# Altium PCB UBSRF315.PcbDoc
Units mm, origin at the board's own origin, x right, y up, seen from the top; angles counter-clockwise.
Board outline 152.4 x 101.6 mm, 2 copper layers (Top Layer, Bottom Layer), stack 0.325 mm thick; 24 components, 26 nets, 86 pads, 22 vias.
Unrouted connection lines stored in the file: 1.
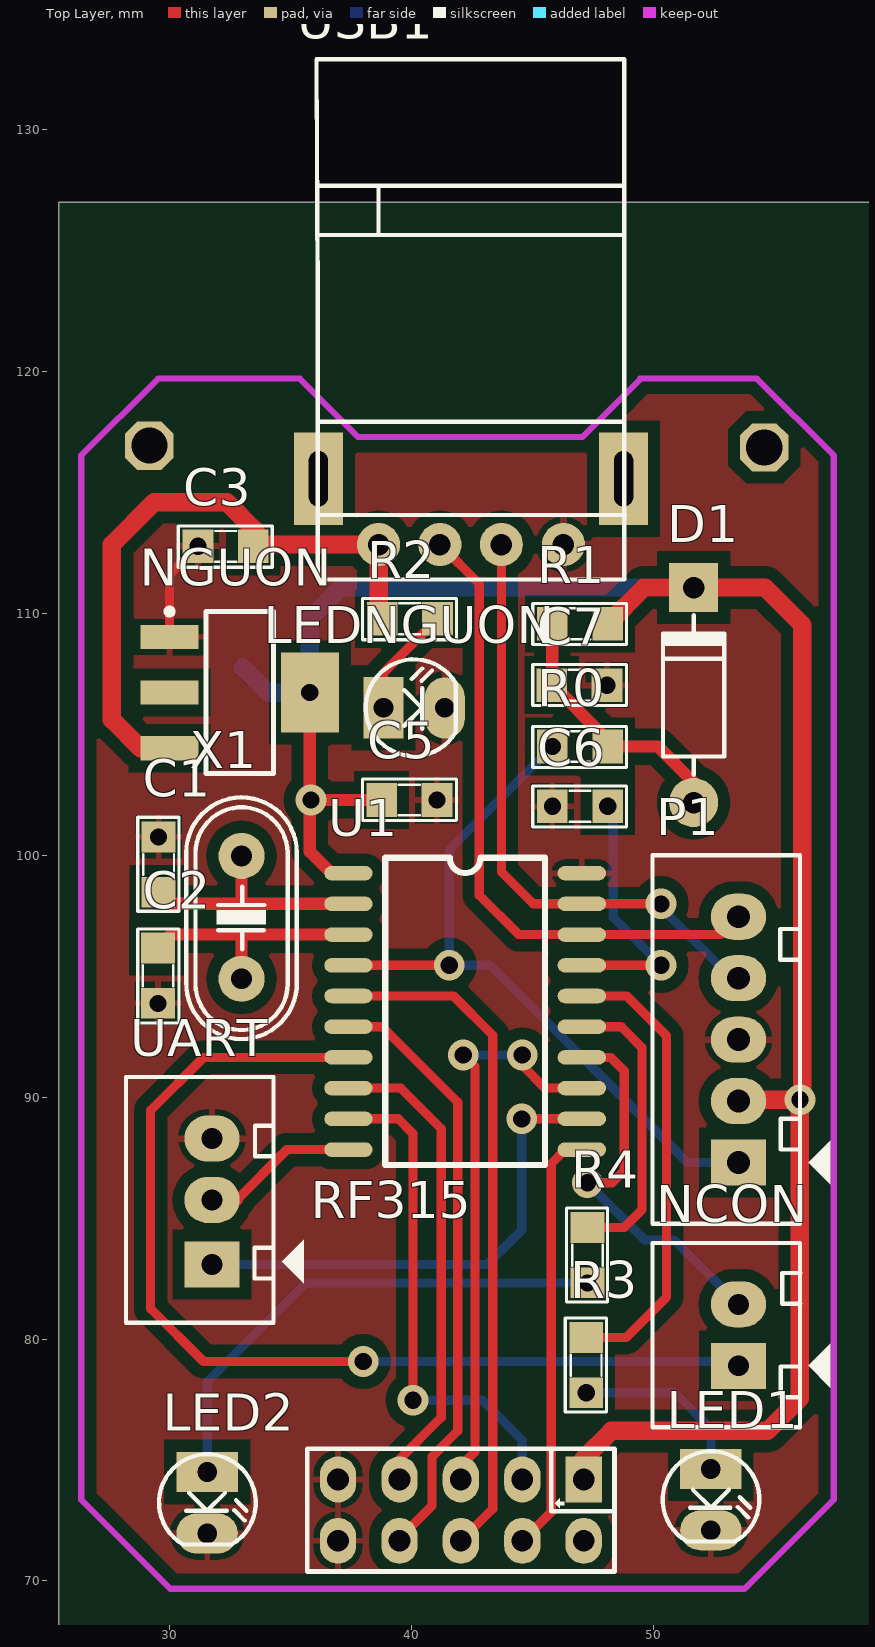
[diagram p0: Top Layer view]
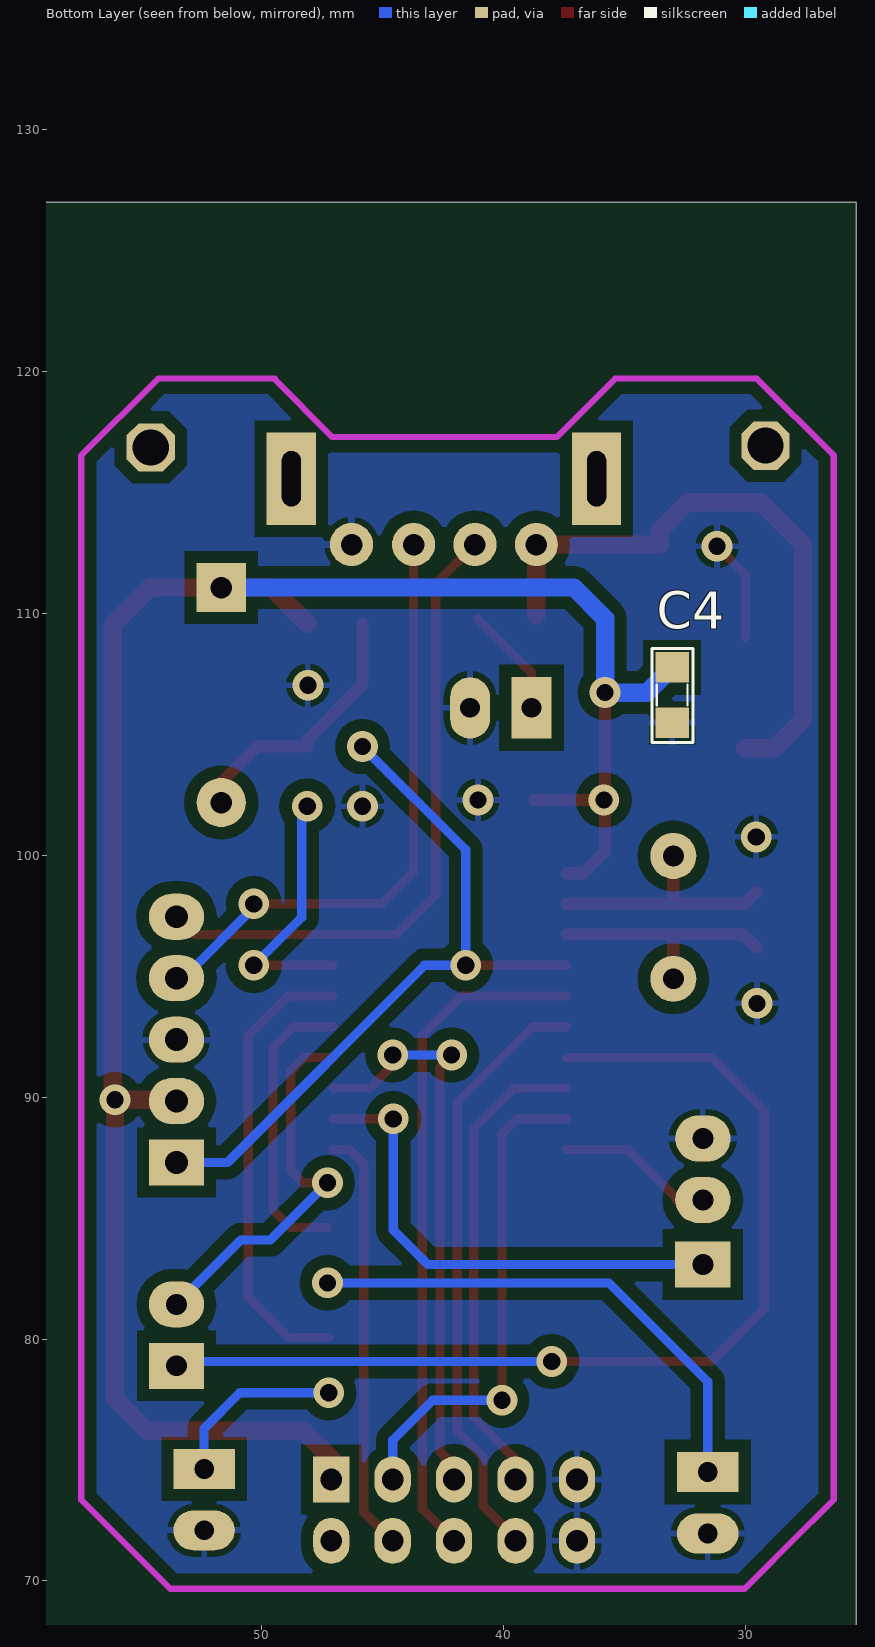
[diagram p1: Bottom Layer view, seen from below]
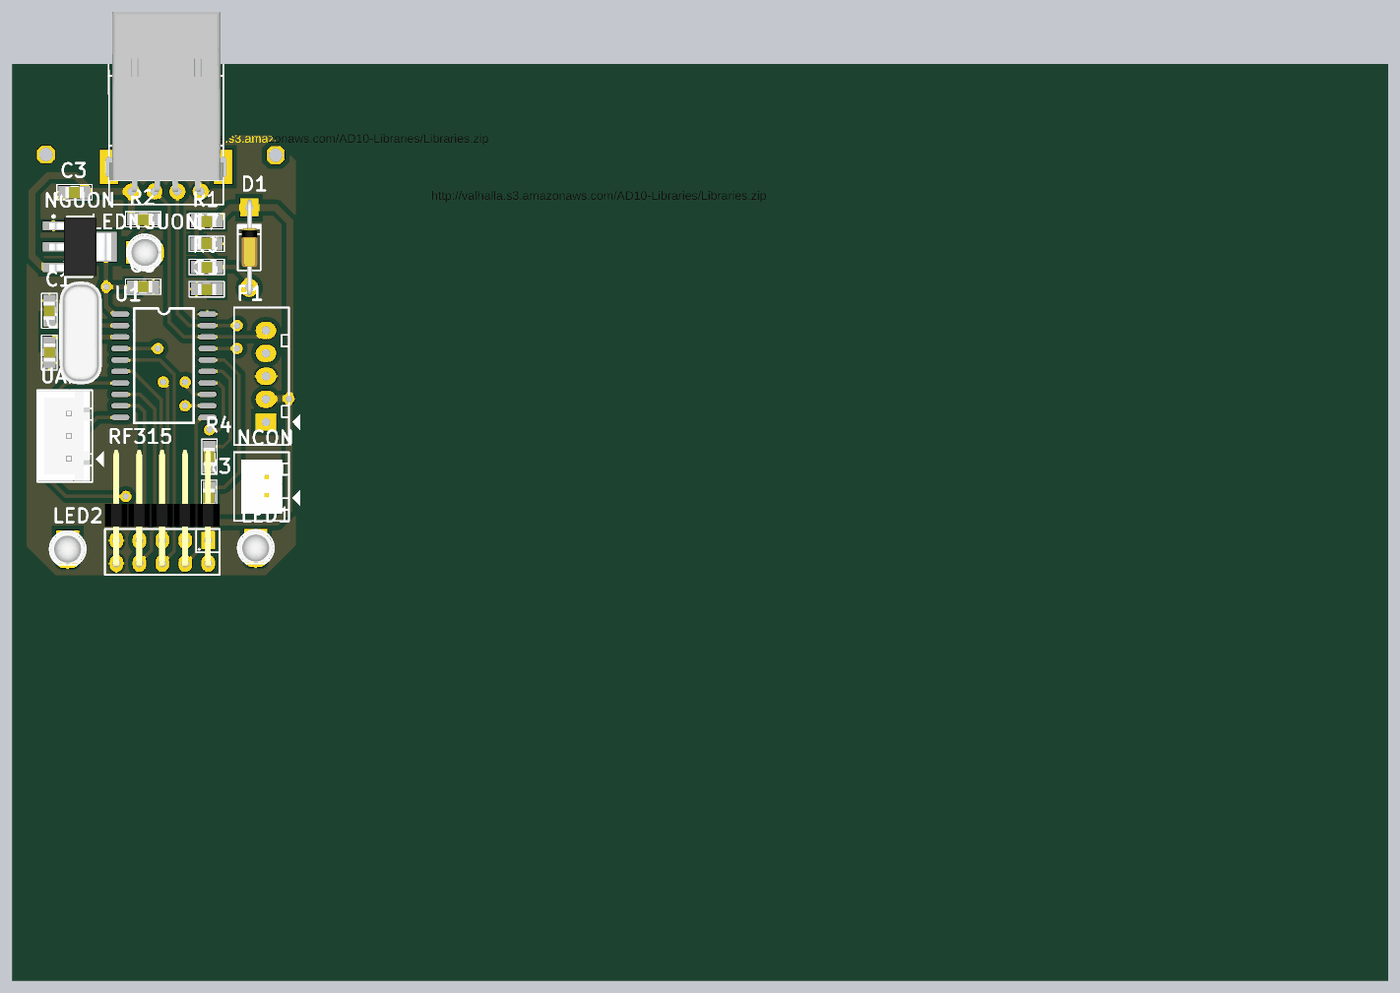
[diagram p2: 3D render of the assembled board from above, using the file's embedded part models]

## Layer stack, top to bottom
Top Layer: signal copper 0.0356
Dielectric 1: core 0.254, FR-4, Dk 4.2
Bottom Layer: signal copper 0.0356

## Board outline
25.4,25.4 177.8,25.4 177.8,127 25.4,127

## Design rules (kind name [scope] priority, off if disabled: settings)
Clearance [All] p1: gap=0.508
PolygonConnect [All] p1: connectstyle=Relief reliefconductorwidth=0.254 reliefentries=4 polygonreliefangle="90 Angle" airgapwidth=0.254
RoomDefinition USB [InComponentClass('USB')] p1: confinementstyle=ConfineIn formatcopy=TRUE lockcomponents=FALSE outline 0,0 50.8,0 50.8,25.4 0,25.4
RoutingVias [All] p1: holewidth=0.711 width=1.27 viastyle="Through Hole" minholewidth=0.711 minwidth=1.27 maxholewidth=0.711 maxwidth=1.27
SolderMaskExpansion [All] p1: expansion=0.102
UnpouredPolygon [All] p1: allowunpoured=FALSE
Width VCC [InNet('VCC')] p1: maxlimit=1.016 minlimit=0.508 preferedwidth=0.762
Width 3.3V [InNet('+3.3V')] p2: maxlimit=1.016 minlimit=0.508 preferedwidth=0.762
Width [All] p3: maxlimit=0.635 minlimit=0.381 preferedwidth=0.508
29 further rules are at their usual default settings.

## Classes and differential pairs
component class USB: USB1

## Components (designator, comment, footprint, x,y, rotation, side; value= is the part's Value field where it differs from the comment)
C1 "33pF" SM-0805 29.54,99.619 r270 top
C2 "33pF" SM-0805 29.515,95.021 r90 top
C3 "103" SM-0805 32.309,112.776 r0 top
C4 "103" SM-0805 33.02,106.629 r90 bottom
C5 "103" SM-0805 39.903,102.286 r180 top
C6 "103" SM-0805 46.965,102.032 r0 top
C7 "103" SM-0805 46.939,107.036 r180 top
D1 "1N4007" D1A 51.664,102.184 r270 top
LED1 "LED" LED-3 52.375,74.625 r270 top
LED2 "LED" LED-3 31.547,74.498 r270 top
LEDNGUON "LED" LED-3 38.837,106.096 r0 top
NCON "JP2" CON2 53.518,78.892 r90 top
NGUON "LM1117" SOT223-4N 32.893,106.731 r0 top
P1 "MACH NAP" CON5 53.518,87.3 r90 top
R0 "330" SM-0805 46.965,104.496 r0 top
R1 "10K" SM-0805 46.965,109.576 r0 top
R2 "220" SM-0805 39.929,109.779 r0 top
R3 "220" SM-0805 47.219,78.918 r270 top
R4 "220" SM-0805 47.269,83.464 r270 top
RF315 "Header 5x2" HED2X5_cen 47.117,74.193 r180 top
U1 "PIC18F14K50-I/P" SOP-20 37.389,99.263 r0 top
UART "JP3" CON3 31.75,83.21 r90 top
USB1 "USB-S" USB-A 38.633,112.852 r0 top
X1 "20MHz" XT2 32.969,97.434 r90 top

## Footprints (in the part's own frame and the unit in brackets; to place one, negate y for a bottom-side part, rotate by r counter-clockwise, add the part's x,y. Pads: shape width x height; smd on the part's side, far side on the other; paste and mask are expansions set on the pad)
CON2 [mil] "CON2"
  rect 75x90 hole 34: 1(0,0)
  oval 75x90 hole 34: 2(100,0)
  silkscreen extent -100,-150 200,140, body extent -68,-70 168,107, height 236
CON3 [mil] "CON 3"
  rect 75x90 hole 34: 1(-5,0)
  oval 75x90 hole 34: 2(100,0) 3(200,0)
  silkscreen extent -100,-150 300,140, body extent -95,-90 295,136, height 276
CON5 [mil] "CON5"
  rect 75x90 hole 37: 1(0,0)
  oval 75x90 hole 37: 2(100,0) 3(200,0) 4(300,0) 5(400,0)
  silkscreen extent -100,-150 500,140
D1A [mil] "Diode 1A, W 100mil, L 350mil"
  round 80 hole 35: 1(0,0)
  rect 80x80 hole 35: 2(-350,0)
  silkscreen extent -305,-50 -45,50, body extent -386,-33 34,36, height 84
HED2X5_cen [mm] "Connector; Header; 5x2 Position"
  rect 1.5x1.9 hole 0.9: 1(0,0)
  oval 1.5x1.9 hole 0.9: 2(2.54,0) 3(5.08,0) 4(7.62,0) 5(10.16,0) 6(0,2.54) 7(2.54,2.54) 8(5.08,2.54) 9(7.62,2.54) 10(10.16,2.54)
  silkscreen extent -1.27,-1.27 11.43,3.81, body extent -1.24,-10.02 11.46,2.86, height 5.02
LED-3 [mil] "LED 2 PIN, 3ly Only colour"
  rect 65x100 hole 32: 1(0,0)
  oval 65x100 hole 32: 2(100,0)
  silkscreen extent -29,-78 118,79, body extent -25,-75 113,75, height 217
SM-0805 [mil] "Compoment SMD 80x50mil"
  rect 50x55 smd: 1(-45,0) 2(45,0)
  silkscreen extent -77,-34 76,33, body extent -40,-27 40,23, height 24
SOP-20 [mm]
  oval 2x0.6 smd: 1(0,0) 2(0,-1.27) 3(0,-2.54) 4(0,-3.81) 5(0,-5.08) 6(0,-6.35) 7(0,-7.62) 8(0,-8.89) 9(0,-10.16) 10(0,-11.43) 11(9.652,-11.43) 12(9.652,-10.16) 13(9.652,-8.89) 14(9.652,-7.62) 15(9.652,-6.35) 16(9.652,-5.08) 17(9.652,-3.81) 18(9.652,-2.54) 19(9.652,-1.27) 20(9.652,0)
  silkscreen extent 1.52,-12.06 8.13,0.64
SOT223-4N [mm] "SOT223, 4-Leads, Body 6.5x3.5mm, Pitch 2.3mm, Lead Span 7mm, IPC Medium Density"
  rect 2.4x1 smd: 1(-2.9,2.3) 2(-2.9,0) 3(-2.9,-2.3)
  rect 2.4x3.3 smd: 4(2.9,0)
  silkscreen extent -3.02,-3.35 1.4,3.47, body extent -3.39,-3.27 3.5,3.23, height 1.72
USB-A [mil]
  round 70 hole 35: 1(0,0) 2(100,0) 3(200,0) 4(301,0)
  rect 80x150 hole 31 slot 90 at 90 deg: 5(-98,107) 6(399,107)
  silkscreen extent -101,-57 401,790, body extent -97,0 399,784, height 177
XT2 [mil] "Footpin for Crystal 2 pin"
  round 75 hole 34: 1(-100,0) 2(100,0)
  silkscreen extent -198,-90 195,90, body extent -233,-93 213,90, height 138

## Part data
C1 C2 C3 C4 C5 C6 C7: library part CM, "Cap SMD"
D1: library part D1A, "Diode 1A"
LED1 LED2 LEDNGUON: "LED Single colour Green and Red"
NCON: library part Con2, "Connector 2"
NGUON: "3v3"
P1: library part "Header 5H", "Header, 5-Pin, Right Angle"
R0 R1 R2 R3 R4: library part R, "Resistor 1/4W"
RF315: library part HED5x2
U1: "USB Flash Microcontroller with nanoWatt XLP Technology, 20-pin PDIP, Industrial Temperature"
UART: library part Con3, "Connector 3"
USB1: library part USB_S, "USB connector"
X1: library part XT2, "Crystal For all Crystal 2pin."

## Free pads (board coordinates)
  oct 2x2 hole 1.5: 0(29.159,116.942) 1(54.585,116.865)

## Via types
v1: diameter 1.27, hole 0.711, Top Layer to Bottom Layer, 22 vias

## Nets (pads, with @x,y where several pads share a name; then routed paths per layer and width w, separated by ;. In a path a pad name is that pad's centre, name@x,y a point inside that pad or via, vN(x,y) a via of type N, cw(c..) or ccw(c..) an arc to the next point about the centre after c; other vN are vias at no path point)
+3.3V: C4.2 C5.2 D1.2 NGUON.2 P1.2 R1.2 RF315.1 U1.1 | length 89.3
  Top Layer w0.508: v1(35.793,106.731) v1@35.793,102.337 ; U1.1 36.678,99.263 35.793,100.148 v1@35.793,102.337 ; C5.2@38.735,102.286 v1(35.844,102.286) v1@35.793,102.337
  Top Layer w0.762: RF315.1 47.117,75.057 48.26,76.2 54.712,76.2 56.058,77.546 v1(56.058,89.891) ; R1.2 49.606,111.074 D1.2 54.61,111.074 56.159,109.525 56.159,89.992 v1(56.058,89.891) ; P1.2@53.873,89.84 P1.2 53.569,89.891 v1(56.058,89.891)
  Bottom Layer w0.762: C4.2 34.061,106.731 v1(35.793,106.731) 35.793,109.783 37.084,111.074 D1.2
D+/PGD: P1.4 U1.19 USB1.3 | length 25.2
  Top Layer w0.381: USB1.3 43.713,99.314 45.034,97.993 U1.19 v1@50.165,97.993
  Bottom Layer w0.381: v1@50.165,97.993 53.238,94.92 P1.4
  other v1: 50.317,97.993
D-/PGC: P1.5 U1.18 USB1.2 | length 26.9
  Top Layer w0.381: USB1.2 42.799,111.227 42.799,98.349 44.425,96.723 U1.18 52.781,96.723 P1.5
GDO0: RF315.9 U1.6 | length 25
  Top Layer w0.381: U1.6 38.786,92.913 41.91,89.789 41.91,76.2 40.843,75.133 40.843,73.101 39.497,71.755 RF315.9
GDO2: RF315.8 U1.5 | length 28.1
  Top Layer w0.381: U1.5 41.732,94.183 43.358,92.558 43.358,72.974 RF315.8
GND: C1.1 C2.1 C3.1 C4.1 C5.1 C6.1 C7.1 LED1.2 LED2.2 LEDNGUON.2 NGUON.1 P1.3 RF315.5 RF315.10 U1.20 UART.3 USB1.4 | length 4.5
  Top Layer w0.381: NGUON.1 29.993,111.603 v1(31.166,112.776) C3.1@31.166,112.471
  other v1: 29.515,93.878 29.54,100.762 45.822,102.032 41.046,102.286 48.082,107.036
LED1: R3.1 U1.16 | length 19
  Top Layer w0.381: U1.16 48.895,94.183 50.546,92.532 50.546,81.737 48.87,80.061 R3.1
LED2: R4.1 U1.15 | length 12.1
  Top Layer w0.381: U1.15 48.666,92.913 49.53,92.05 49.53,85.344 48.793,84.607 R4.1
MCLR: P1.1 R0.1 U1.4 | length 30.3
  Top Layer w0.381: U1.4 v1(41.554,95.453)
  Bottom Layer w0.381: v1(45.822,104.496) 41.554,100.228 v1(41.554,95.453) 43.256,95.453 51.41,87.3 P1.1
MISO: RF315.3 U1.13 | length 23.7
  Top Layer w0.381: RF315.3 42.037,74.752 42.621,75.336 42.621,91.262 v1(42.139,91.745) ; v1(44.577,91.745) 44.577,91.313 45.517,90.373 U1.13
  Bottom Layer w0.381: v1(42.139,91.745) v1(44.577,91.745)
MOSI: RF315.2 U1.9 | length 20.8
  Top Layer w0.381: U1.9 39.446,89.103 40.056,88.494 v1(40.056,77.47)
  Bottom Layer w0.381: v1(40.056,77.47) 42.926,77.47 44.577,75.819 RF315.2
NC: RF315.6
NC1: NCON.2 U1.14 | length 16.2
  Top Layer w0.381: U1.14 48.235,91.643 48.793,91.084 48.793,86.97 48.285,86.462 v1(47.269,86.462)
  Bottom Layer w0.381: v1(47.269,86.462) 49.632,84.099 50.851,84.099 NCON.2
NC2: NCON.1 U1.7 | length 42.6
  Top Layer w0.381: U1.7 31.394,91.643 29.21,89.459 29.21,81.255 31.394,79.07 v1(37.998,79.07)
  Bottom Layer w0.381: v1(37.998,79.07) 53.34,79.07 NCON.1
NetC6_2: C6.2 U1.17 | length 10.8
  Top Layer w0.381: U1.17 v1(50.317,95.453)
  Bottom Layer w0.381: v1(48.108,102.032) 48.336,101.803 48.336,97.434 v1(50.317,95.453)
NetC7_2: C7.2 D1.1 R0.2 R1.1 | length 11
  Top Layer w0.508: R1.1 45.822,107.061 48.108,104.775 R0.2 50.19,104.496 51.664,103.022 D1.1
NetLED1_1: LED1.1 R3.2 | length 7.4
  Bottom Layer w0.381: v1(47.219,77.775) 50.902,77.775 52.375,76.302 LED1.1
NetLED2_1: LED2.1 R4.2 | length 21.2
  Bottom Layer w0.381: LED2.1 31.547,78.232 35.636,82.321 v1(47.269,82.321)
NetLEDNGUON_1: LEDNGUON.1 R2.2 | length 4.6
  Top Layer w0.381: LEDNGUON.1 38.837,107.544 R2.2
OSC1: C1.2 U1.2 X1.2 | length 10.1
  Top Layer w0.508: C1.2 30.023,97.993 32.918,97.993 ; X1.2 32.969,98.044 32.918,97.993 ; U1.2 32.918,97.993
OSC2: C2.2 U1.3 X1.1 | length 10
  Top Layer w0.508: C2.2 30.074,96.723 33.02,96.723 ; X1.1 32.969,96.672 33.02,96.723 ; U1.3 33.02,96.723
RX: U1.12 UART.1 | length 20.5
  Top Layer w0.381: v1(44.552,89.103) U1.12
  Bottom Layer w0.381: UART.1 43.129,83.083 44.552,84.506 v1(44.552,89.103)
SCK: RF315.7 U1.11 | length 17.6
  Top Layer w0.381: RF315.7 45.771,72.848 45.771,87.25 46.355,87.833 U1.11
SS: RF315.4 U1.8 | length 20
  Top Layer w0.381: U1.8 39.548,90.373 41.224,88.697 41.224,76.759 39.497,75.032 RF315.4 RF315.4@39.7,74.193
TX: U1.10 UART.2 | length 6.5
  Top Layer w0.381: UART.2@32.766,85.75 34.849,87.833 U1.10
  Top Layer w0.508: UART.2 UART.2@32.766,85.75
VCC: C3.2 NGUON.3 R2.1 USB1.1 | length 25.9
  Top Layer w0.762: NGUON.3 28.792,104.431 27.61,105.613 27.61,112.852 29.362,114.605 32.36,114.605 33.528,113.436 33.528,112.852 USB1.1 R2.1@38.633,109.931
pads on no net: NGUON.4 USB1.5 USB1.6

## Polygon pours and split planes (outlines as drawn)
GND on Bottom Layer "Top Layer-No Net" (solid, remove dead copper, pour order 41): 29.515,119.71 26.34,116.535 26.34,73.355 26.416,73.355 30.099,69.672 53.772,69.672 57.455,73.355 57.455,116.535 54.28,119.71 49.454,119.71 49.454,119.685 47.066,117.297 37.795,117.297 35.382,119.71 29.515,119.71
GND on Top Layer "Top Layer-No Net" (solid, remove dead copper, pour order 43): 57.455,73.355 57.455,116.535 54.28,119.71 49.479,119.71 49.466,119.697 47.066,117.297 37.795,117.297 35.382,119.71 29.515,119.71 26.34,116.535 26.34,73.355 30.023,69.672 53.772,69.672 57.455,73.355

## Keep-outs
Keep-Out Layer:
  lines w0.254: 26.34,115.773 26.34,116.535 29.515,119.71 30.15,119.71 35.382,119.71 37.795,117.297 47.066,117.297 49.466,119.697 ; 26.34,115.9 26.34,115.265 26.34,73.355 26.975,72.72 27.61,72.085 30.023,69.672 30.658,69.672 53.772,69.672 57.455,73.355 57.455,116.027 57.455,116.535 54.28,119.71 49.454,119.71

## Silkscreen, mask and mechanical layers (free items; w line width, h text height)
Top Solder:
  text "http://valhalla.s3.amazonaws.com/AD10-Libraries/Libraries.zip" at 41.072,118.262 h1.52
  text "http://valhalla.s3.amazonaws.com/AD10-Libraries/Libraries.zip" at 71.831,111.938 h1.52